# Altium PCB PCB_smart_home.PcbDoc
Units mil, origin at the board's own origin, x right, y up, seen from the top; angles counter-clockwise.
Board outline 3120 x 1595 mil, 2 copper layers (Top Layer, Bottom Layer); 22 components, 27 nets, 114 pads, 35 vias.
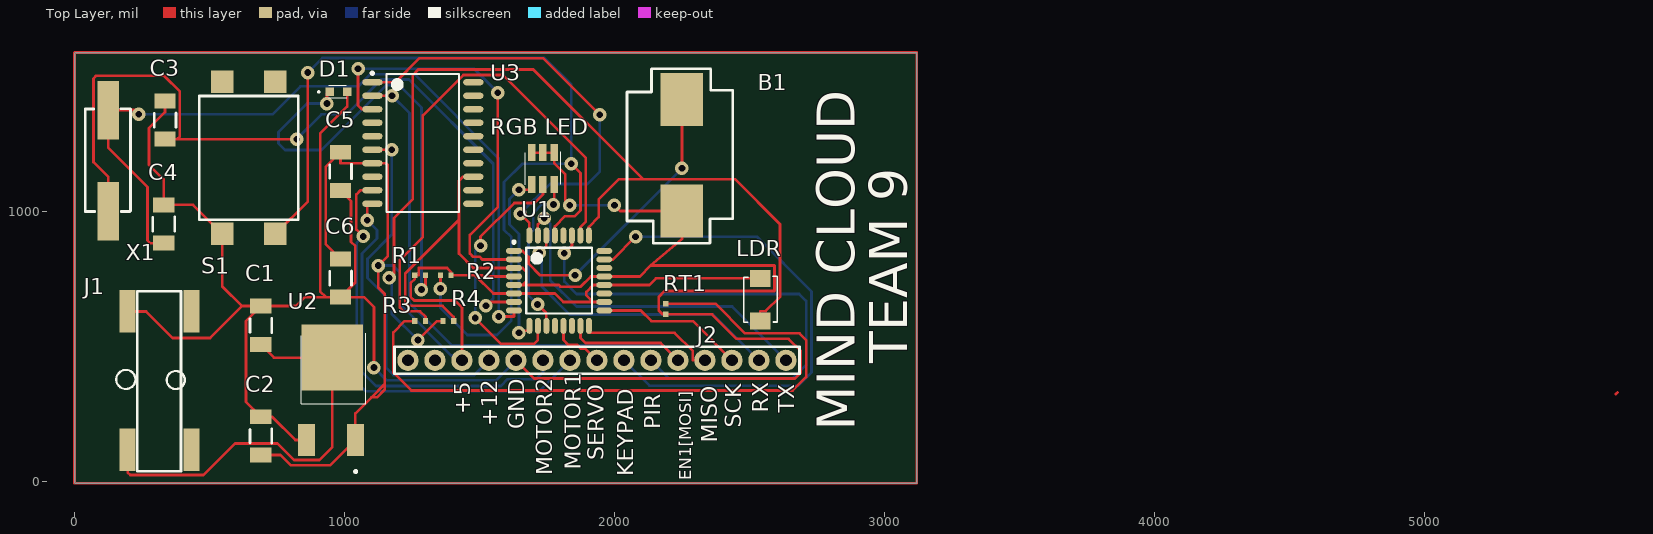
[diagram p0: Top Layer view]
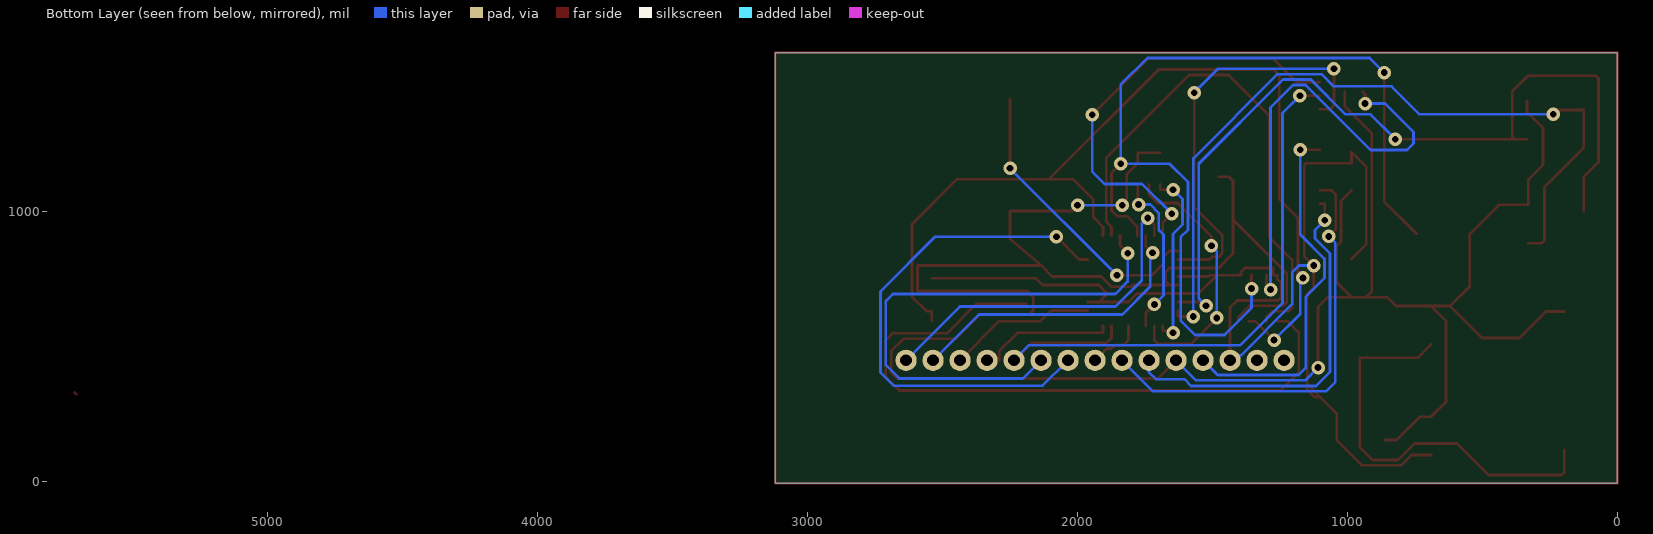
[diagram p1: Bottom Layer view, seen from below]

## Layer stack, top to bottom
Top Solder: solder mask 0.4, Solder Resist, Dk 3.5
Top Layer: signal copper 1.4
Dielectric 1: dielectric 12.6, FR-4, Dk 4.8
Bottom Layer: signal copper 1.4
Bottom Solder: solder mask 0.4, Solder Resist, Dk 3.5

## Board outline
0,-5 0,1590 3120,1590 3120,-5

## Design rules (kind name [scope] priority, off if disabled: settings)
Clearance [All] p1: gap=10 ignorepadtopadclearanceinfootprint=FALSE
PolygonConnect [All] p1: connectstyle=Relief reliefconductorwidth=10 reliefentries=4 polygonreliefangle="90 Angle" airgapwidth=10
RoutingVias [All] p1: holewidth=25 width=50 viastyle="Through Hole" minholewidth=25 minwidth=50 maxholewidth=25 maxwidth=50
SolderMaskExpansion [All] p1: expansion=4 istentingtop=FALSE
SupplyNets "Schematic Supply Nets_2" [InNet('+12')] p1: voltage=0.000
SupplyNets "Schematic Supply Nets_1" [InNet('GND')] p2: voltage=0.000
SupplyNets "Schematic Supply Nets" [InNet('+5')] p3: voltage=0.000
Width [All] p1: maxlimit=10 minlimit=10 preferedwidth=10
30 further rules are at their usual default settings.

## Components (designator, comment, footprint, x,y, rotation, side; value= is the part's Value field where it differs from the comment)
B1 "CMT-1271-88-SMT-TR" PCBComponent_1#1 2250,1210 r0 top
C1 "0.33uF" PCBComponent_1#2 690,580 r90 top
C2 "0.1uF" PCBComponent_1#2 690,170 r90 top
C3 "22PF" PCBComponent_1#2 335,1340 r90 top
C4 "22PF" PCBComponent_1#2 330,955 r90 top
C5 "100nF" PCBComponent_1#2 985,1150 r90 top
C6 "100nF" PCBComponent_1#2 985,755 r90 top
D1 "KPT-1608ZGC" PCBComponent_1#3 945,1445 r0 top
J1 "PJ-002AH-SMT-TR" PCBComponent_1#4 315,375 r90 top
J2 "connector;str header;single row;.1 cont centers;.095 tail;gold or gtx;36 contact" Header 2635,450 r180 top
LDR "RS1G" PCBComponent_1#5 2540,675 r0 top
R1 "330 Ω" RESC1005X04N 1280,765 r0 top
R2 "1K" RESC1005X04N 1375,765 r0 top
R3 "resistor SMD" RESC1005X04N 1280.31,595 r0 top
R4 "10k" RESC1005X04N 1384.68,595 r0 top
"RGB LED" "ASMB-TTF2-0B20B" PCBComponent_1#6 1735,1160 r90 top
RT1 "10K" RESC1005X04N 2190,640 r90 top
S1 "TS16-1212-85-BK-100-SMT-TR" PCBComponent_1#7 645,1200 r90 top
U1 "ATMEGA8A-AU_C16190" TQFP80P900X900X120-32N 1795,745 r0 top
U2 "MC78M05ACDTRKG" PCBComponent_1#8 955,460 r270 top
U3 "Driver L293D" SOIC127P1030X265-20N 1290,1255 r0 top
X1 "16 MHZ" PCBComponent_1#9 125,1190 r90 top

## Footprints (in the part's own frame and the unit in brackets; to place one, negate y for a bottom-side part, rotate by r counter-clockwise, add the part's x,y. Pads: shape width x height; smd on the part's side, far side on the other; paste and mask are expansions set on the pad)
Header [mm] "SIL Header"
  round 2 hole 1.1: 1(0,0) 2(2.54,0) 3(5.08,0) 4(7.62,0) 5(10.16,0) 6(12.7,0) 7(15.24,0) 8(17.78,0) 9(20.32,0) 10(22.86,0) 11(25.4,0) 12(27.94,0) 13(30.48,0) 14(33.02,0) 15(35.56,0)
  silkscreen extent -1.27,-1.27 36.83,1.27, body extent -1.33,-1.35 36.93,1.35, height 8.6
PCBComponent_1#1 [mm]
  rect 4x5 smd: 1(0,5.25) 2(0,-5.25)
  silkscreen extent -5.18,-8.28 4.78,8.13, body extent -6.55,-6.82 6.25,7.08, height 7.15
PCBComponent_1#2 [mm]
  rect 1.4x2 smd: 1(-1.8,0) 2(1.8,0)
  silkscreen extent -0.69,-1.04 0.66,1.02, body extent -1.65,-1 1.55,0.8, height 1.6
PCBComponent_1#3 [mm]
  rect 0.8x0.8 smd: 1(0,0) 2(1.65,0)
  silkscreen extent -1.08,-0.56 1.6,0.61, body extent -0.01,-0.37 1.59,0.43, height 1.11
PCBComponent_1#4 [mm]
  rect 4x1.5 smd: 1(-6.5,3) 2(6.5,3) 3(6.5,-3) 4(-6.5,-3)
  silkscreen extent -8.53,-2.37 8.41,4.07, body extent -6.05,-6.93 6.55,7.97, height 11.01
PCBComponent_1#5 [mm]
  rect 1.9x1.6 smd: 1(0,2) 2(0,-2)
  silkscreen extent -1.55,-2.13 1.6,2.18, body extent -1.38,-2.54 1.18,2.6, height 2.58
PCBComponent_1#6 [mm]
  rect 1.6x0.7 smd: 1(-1.5,1.05) 2(1.5,1.05) 3(-1.5,0) 4(1.5,0) 5(-1.5,-1.05) 6(1.5,-1.05)
  silkscreen extent -1.52,-1.65 1.57,1.68, body extent -1.85,-1.72 1.85,1.78, height 2.8
PCBComponent_1#7 [mm]
  rect 2.1x2.1 smd: 1(-7.15,2.5) 2(-7.15,-2.5) 3(7.15,2.5) 4(7.15,-2.5)
  silkscreen extent -5.82,-4.67 5.82,4.65, body extent -7.6,-6.23 7.6,5.77, height 8.8
PCBComponent_1#8 [mm]
  rect 6.2x5.8 smd: 1(0,0)
  rect 3x1.6 smd: 2(7.747,2.159) 3(7.747,-2.411)
  silkscreen extent -2.29,-2.95 10.82,3.15, body extent -1.85,-3.3 8.05,3.2, height 2.59
PCBComponent_1#9 [mm]
  rect 5.5x2 smd: 1(-4.75,0) 2(4.75,0)
  silkscreen extent -4.8,-2.08 4.88,2.16, body extent -6.55,-2.33 6.65,2.47, height 4.31
RESC1005X04N [mm] "Chip Resistor, 2-Leads, Body 1.00x0.50mm, IPC Medium Density"
  rect 0.5x0.55 smd: 1(-0.5,0) 2(0.5,0)
  body extent -0.53,-0.28 0.53,0.28, height 0.4
SOIC127P1030X265-20N [mm] "SOIC, 20-Leads, Body 12.80x7.50mm, Pitch 1.27mm, IPC Medium Density"
  oval 1.9x0.6 smd: 1(-4.75,5.715) 2(-4.75,4.445) 3(-4.75,3.175) 4(-4.75,1.905) 5(-4.75,0.635) 6(-4.75,-0.635) 7(-4.75,-1.905) 8(-4.75,-3.175) 9(-4.75,-4.445) 10(-4.75,-5.715) 11(4.75,-5.715) 12(4.75,-4.445) 13(4.75,-3.175) 14(4.75,-1.905) 15(4.75,-0.635) 16(4.75,0.635) 17(4.75,1.905) 18(4.75,3.175) 19(4.75,4.445) 20(4.75,5.715)
  silkscreen extent -4.87,-6.5 3.4,6.69, body extent -5.16,-6.5 5.16,6.5, height 2.65
TQFP80P900X900X120-32N [mm] "TQFP, 32-Leads, Body 7.00x7.00mm, Pitch 0.80mm, IPC Medium Density"
  oval 1.5x0.55 smd: 1(-4.25,2.8) 2(-4.25,2) 3(-4.25,1.2) 4(-4.25,0.4) 5(-4.25,-0.4) 6(-4.25,-1.2) 7(-4.25,-2) 8(-4.25,-2.8) 17(4.25,-2.8) 18(4.25,-2) 19(4.25,-1.2) 20(4.25,-0.4) 21(4.25,0.4) 22(4.25,1.2) 23(4.25,2) 24(4.25,2.8)
  oval 0.55x1.5 smd: 9(-2.8,-4.25) 10(-2,-4.25) 11(-1.2,-4.25) 12(-0.4,-4.25) 13(0.4,-4.25) 14(1.2,-4.25) 15(2,-4.25) 16(2.8,-4.25) 25(2.8,4.25) 26(2,4.25) 27(1.2,4.25) 28(0.4,4.25) 29(-0.4,4.25) 30(-1.2,4.25) 31(-2,4.25) 32(-2.8,4.25)
  silkscreen extent -4.37,-3.1 3.1,3.75, body extent -4.5,-4.5 4.5,4.5, height 1.2

## Part data
B1: library part buzzer, "88dB Passive (external drive) Electromagnetic Type 2.4kHz Buzzers ROHS", manufactor=CUI, supplier part number=C3811771, ComponentLink1Description="snapeda link", ComponentLink1URL=https://www.snapeda.com/parts/CMT-1271-88-SMT-TR/CUI%20Devices/view-part/?ref=search&t=Buzzer%20smd, ComponentLink2Description=datasheet, ComponentLink2URL=https://www.snapeda.com/parts/CMT-1271-88-SMT-TR/CUI%20Devices/datasheet/, manufactor part number=CMT-1271-88-SMT-TR, supplier=LCSC
C1 C2 C3 C4 C5 C6: library part "capacitor_1206 CODE", "100V 100nF C0G ±5% 1206 Multilayer Ceramic Capacitors MLCC - SMD/SMT ROHS", manufactor="Murata Electronics", manufactor part number=GRM31C5C2A104JA01L, supplier part number=C405303, ComponentLink1Description="snapeda link", ComponentLink1URL=https://www.snapeda.com/parts/GRM31C5C2A104JA01L/Murata/view-part/?ref=search&t=1206%20cap%20smd, ComponentLink2Description=Datasheet, ComponentLink2URL=https://www.snapeda.com/parts/GRM31C5C2A104JA01L/Murata/datasheet/, supplier=LCSC
D1: library part LED, "SMD LED Indication - Discrete ROHS", Manufacturer=Kingbright, supplier part number=C598364, ComponentLink1Description=datasheet, ComponentLink1URL=https://www.snapeda.com/parts/KPT-1608ZGC/Kingbright/datasheet/, ComponentLink2Description="snapeda link", ComponentLink2URL=https://www.snapeda.com/parts/KPT-1608ZGC/Kingbright/view-part/?welcome=home&ref=search&t=LED+SMD, ComponentLink3Description="LCSC link", ComponentLink3URL=https://www.lcsc.com/product-detail/LED-Indication-Discrete_Kingbright-KPT-1608ZGC_C598364.html, Manufacturer part number=KPT-1608ZGC, supplier=LCSC
J1: library part "DC connector", "SMD DC Power Connectors ROHS", Manufacturer=CUI, package=SMD, supplier part number=C22434687, ComponentLink1Description="snapeda link", ComponentLink1URL=https://www.snapeda.com/parts/PJ-002AH-SMT-TR/CUI%20Devices/view-part/?ref=search&t=DC%20connector%20SMD, ComponentLink2Description=datasheet, ComponentLink2URL=https://www.snapeda.com/parts/PJ-002AH-SMT-TR/CUI%20Devices/datasheet/, Manufacturer part number=PJ-002AH-SMT-TR, supplier=LCSC
J2: library part "Single row; PCB headers", Current Rating="3Amps Continuous", Manufacturer=FCI, Manufacturer Part No.=68000-236HLF, Created By="R Kanjee", Date Created="1 March 2015", RS Stock No.=2509565626
LDR: library part "LDR sensor", "1A Independent Type 1.3V@1A 400V SMA(DO-214AC) Diodes - General Purpose ROHS", manufactor="SMC(Sangdest Microelectronicstronic (Nanjing))", ComponentLink1Description=snapeda, ComponentLink1URL=https://www.snapeda.com/parts/RS1G/Taiwan%20Semiconductor/view-part/?ref=search&t=LDR%20sensor%20smd, ComponentLink2Description=datasheet, ComponentLink2URL=https://www.snapeda.com/parts/RS1G/Taiwan%20Semiconductor/datasheet/, manufactor part time=RS1G, supplier=LCSC, supplier part time=C260336
R1 R2 R3 R4: library part Resistor, "500mW Thick Film Resistors 400V ±100ppm/℃ ±1% 100Ω 1210 Chip Resistor - Surface Mount ROHS", Manufacturer=PANASONIC, Manufacturer part number=ERJ-U14F1000U, supplier part number=C1014086, ComponentLink1Description=Datasheet, ComponentLink1URL=https://www.lcsc.com/datasheet/lcsc_datasheet_2201131530_PANASONIC-ERJ-U14F1000U_C1014086.pdf, supplier=Lcsc
"RGB LED": library part "RGB LED", "PLCC-6 RGB LEDs ROHS", manufactor="Broadcom Limited", supplier part number=C6126294, ComponentLink1Description="snapeda link", ComponentLink1URL=https://www.snapeda.com/parts/ASMB-TTF2-0B20B/Broadcom%20%2F%20Avago/view-part/?ref=search&t=RGB%20led%20smd, ComponentLink2Description=datasheet, ComponentLink2URL=https://www.snapeda.com/parts/ASMB-TTF2-0B20B/Avago%20Technologies/datasheet/, ComponentLink3Description="LCSC link", ComponentLink3URL=https://www.lcsc.com/product-detail/RGB-LEDs_Broadcom-Limited-ASMB-TTF2-0B20B_C6126294.html, manufactor part number=ASMB-TTF2-0B20B, supplier=LCSC
RT1: library part "NTC temperature sensor", "10kΩ ±0.5% 3380K ±0.7% 0402 NTC Thermistors ROHS / Recommended For You", Manufacturer="Murata Electronics", Manufacturer part number=NCU15XH103D6SRC, supplier part number=C17294780, ComponentLink1Description=datasheet, ComponentLink1URL=https://www.lcsc.com/datasheet/lcsc_datasheet_2401291008_Murata-Electronics-NCU15XH103D6SRC_C17294780.pdf, supplier=lcsc
S1: library part switch, "50mA Standing paste SPST - normally open 100gf 12V Tactile Switches ROHS", manufactor=CUI, supplier part number=C6338790, ComponentLink1Description=snapeda, ComponentLink1URL=https://www.snapeda.com/parts/TS16-1212-85-BK-100-SMT-TR/CUI%20Devices/view-part/?ref=search&t=switch%20smd, ComponentLink2Description=datasheet, ComponentLink2URL=https://www.snapeda.com/parts/TS16-1212-85-BK-100-SMT-TR/CUI%20Devices/datasheet/, manufactor part time=TS16-1212-85-BK-100-SMT-TR, supplier=LCSC
U1: library part ATMEGA8A-AU, "8KB 1KB FLASH 23 2.7V~5.5V AVR 16MHz TQFP-32(7x7) Microcontrollers (MCU/MPU/SOC) ROHS", Manufacturer="Microchip Tech", supplier part number=C16190, ComponentLink1Description=Datasheet, ComponentLink1URL=https://www.lcsc.com/datasheet/lcsc_datasheet_1810161120_Microchip-Tech-ATMEGA8A-AU_C16190.pdf, Manufacturer part number=ATMEGA8A-AU, supplier=LCSC
U2: library part regulator, "500mA 80dB@(120Hz) Fixed 5V Positive electrode 35V TO-252-2(DPAK) Voltage Regulators - Linear, Low Drop Out (LDO) Regulators ROHS", Manufacturer=onsemi, supplier part number=C232660, ComponentLink1Description="snapeda link", ComponentLink1URL=https://www.snapeda.com/parts/MC78M05ACDTRKG/onsemi/view-part/?ref=search&t=regulator%205v%20smd, ComponentLink2Description=Datasheet, ComponentLink2URL=https://www.snapeda.com/parts/MC78M05ACDTRKG/onsemi/datasheet/, ComponentLink3Description="LCSC link", ComponentLink3URL=https://www.lcsc.com/product-detail/Voltage-Regulators-Linear-Low-Drop-Out-LDO-Regulators_onsemi-MC78M05ACDTRKG_C232660.html, Manufacturer part number=MC78M05ACDTRKG, supplier=LCSC
U3: "SOIC-20-300mil Stepper Motor Driver ROHS", Manufacturer=STMicroelectronics, Manufacturer part number=L293DD013TR, supplier part number=C21610, ComponentLink1Description=datasheet, ComponentLink1URL=https://www.lcsc.com/datasheet/lcsc_datasheet_2304140030_STMicroelectronics-L293DD013TR_C21610.pdf, supplier=LCSC
X1: library part crystal, "16MHz ±30ppm ±50ppm HC-49S-SMD Crystals ROHS", ComponentLink1Description="snapeda link", ComponentLink1URL=https://www.snapeda.com/parts/ECS-160-S-5P-TR/ECS%20International/view-part/?ref=search&t=16MHZ%20crystl, ComponentLink2Description=datasheet, ComponentLink2URL=https://www.lcsc.com/datasheet/lcsc_datasheet_2211020230_ECS-ECS-160-S-5P-TR_C2450888.pdf, ComponentLink3Description="LCSC link", ComponentLink3URL=https://www.lcsc.com/product-detail/Crystals_span-style-background-color-ff0-ECS-span-ECS-160-S-5P-TR_C2450888.html

## Via types
v1: diameter 50, hole 25, Top Layer to Bottom Layer, 35 vias

## Nets (pads, with @x,y where several pads share a name; then routed paths per layer and width w, separated by ;. In a path a pad name is that pad's centre, name@x,y a point inside that pad or via, vN(x,y) a via of type N, cw(c..) or ccw(c..) an arc to the next point about the centre after c; other vN are vias at no path point)
+5: C2.1 C5.2 C6.2 J2.13 LDR.1 R1.1 R2.2 U1.4 U1.6 U1.18 U1.20 U2.2 U3.7 | length 4903
  Top Layer w10: C2.1 762.87,99.13 801.06,60.94 945.94,60.94 U2.2 1040,253 1100,313 ; C6.2 930,880.87 930,1165.87 C5.2 985,1180 U3.7 1154,1180 1160.63,1173.37 1160.63,836.63 v1(1125,801) 1125,719.83 1149,695.83 1149,362 ; J2.13 1435,645 1408.37,671.63 1258.37,671.63 1245,685 1245,736.31 1260.32,751.63 R1.1 1274.46,765 1274.46,792 1380,792 1394.69,777.31 R2.2 1484,765 ; U1.4 1513.25,760.75 1509,765 1484,765 ; U1.18 1920,666.26 ; LDR.1 2154,753.74 2129.51,729.25 U1.20 1921.25,729.25 1895.74,703.74 1895.74,690.52 1920,666.26 ; 1100,313 1149,362 ; 1100,313 1120,313 1149,342 1149,362 ; 1484,765 1551.24,697.76 U1.6 1779,697.76 1810.5,666.26 1920,666.26
  Bottom Layer w10: v1(1125,801) 1180,801 1205,776 1205,658 1395,468 1435,468 J2.13
+12: J2.12 U3.6 | length 1359.9
  Top Layer w10: U3.6 v1(1175,1230)
  Bottom Layer w10: v1(1175,1230) 1175,916 1085,826 1085,755 1155,685 1155,421.63 1181,395.63 1480.63,395.63 J2.12
BLUE: "RGB LED.5" U1.11 | length 615.4
  Top Layer w10: v1(1715,657) 1747.76,624.24 U1.11 ; v1(1774,1027) 1776.34,1029.34 1776.34,1100.94
  Bottom Layer w10: v1(1715,657) 1681.78,690.22 1681.78,916.15 1699.25,933.62 1699.25,996.1 1730.15,1027 v1(1774,1027)
BUZZER: B1.1 U1.1 | length 1094.5
  Top Layer w10: U1.1 1660,855.24 1681.78,833.45 1681.78,807.79 1724.58,765 v1(1854,765) ; v1(2250,1161) B1.1
  Bottom Layer w10: v1(1854,765) v1(2250,1161)
EN1: J2.5 U1.15 U3.2 | length 2390.1
  Top Layer w10: U3.2 v1(1176,1430) ; U1.15 1873.74,533 1892.74,514 2171,514 J2.5
  Bottom Layer w10: v1(1176,1430) 1240.63,1365.37 1240.63,662.37 1397,506 2179,506 J2.5
GND: "RGB LED.2" "RGB LED.4" "RGB LED.6" B1.2 C1.2 C2.2 C3.2 C4.2 C5.1 C6.1 D1.2 J1.2 J2.11 R4.2 RT1.1 S1.1 U1.3 U1.5 U1.21 U2.3 U3.13 | length 10326.1
  Top Layer w10: J1.2 265.09,630.91 363,533 502.13,533 620,650.87 ; C3.2 335,1369 276,1310 276,1174 330,1120 C4.2 439.21,1025.87 S1.1 546.58,724.29 620,650.87 ; U2.3 817.87,155 732,240.87 C2.2 635,295.87 635,595.87 C1.2 ; C5.1 1024,1040.13 1024,889 1040,873 1040,739.13 C6.1 ; D1.2 1009.96,1389.89 910,1289.93 910,705 930.87,684.13 ; v1(1109,423) 1109,647 1071.87,684.13 C6.1 ; R4.2 1404.37,610.63 1363.37,651.63 1238.37,651.63 1225,665 1225,771.63 1424,970.63 ; U3.13 1439,1130 1424,1115 1424,970.63 ; U1.5 1660,729.25 ; J2.11 1702,383 2668,383 2690,405 2690,485 2645.24,529.76 2452.26,529.76 2361.7,620.32 RT1.1 2178.68,620.32 2164,635 2164,685 2186,707 2593,707 2593,801 2134,801 ; 1693.66,1219.06 1735,1219.06 1776.34,1219.06 1776.34,1180.66 1818,1139 1818,1040 v1(1834,1024) ; v1(2000,1024) 2021,1003 B1.2@2250,1003 ; B1.2 B1.2@2250,1003 ; 620,650.87 C1.2 ; C1.2 820,650.87 853.27,684.13 930.87,684.13 ; 930.87,684.13 C6.1 ; 1424,970.63 1424,845 1476.76,792.24 U1.3 1660,792.24 1673,779.24 1673,742.25 1660,729.25 ; 1660,729.25 1794,729.25 1800.75,722.5 1874,722.5 1912.24,760.75 U1.21 2093.75,760.75 2134,801 ; 2134,801 2250,899.48 B1.2@2250,1003
  Bottom Layer w10: v1(1109,423) 1156.37,375.63 1560.63,375.63 J2.11 ; v1(1834,1024) v1(2000,1024)
GREEN: "RGB LED.3" U1.10 | length 971.8
  Top Layer w10: v1(1484,607) 1580,511 1702.26,511 1716.26,525 U1.10 ; v1(1504,874) 1504,908 1629,1033 1703,1033 1735,1065 1735,1100.94
  Bottom Layer w10: v1(1484,607) 1484,854 v1(1504,874)
IN1: U1.32 U3.1 | length 1630.5
  Top Layer w10: U3.1 1189,1480 1278.17,1569.17 1735.83,1569.17 v1(1945,1360) ; v1(1651,993) 1684.76,959.24 U1.32
  Bottom Layer w10: v1(1651,993) 1761,1103 1900,1103 1945,1148 v1(1945,1360)
IN2: U1.2 U3.3 | length 1561.2
  Top Layer w10: v1(1050,1530) 1050,1394 1064,1380 U3.3 ; v1(1568,1441) 1568,1018 1464,914 1464,845 1475,834 1500,834 1510.26,823.74 U1.2
  Bottom Layer w10: v1(1050,1530) 1479,1530 v1(1568,1441)
KEYPAD: J2.7 U1.23 | length 1940.9
  Top Layer w10: U1.23 1993.74,823.74 v1(2078,908)
  Bottom Layer w10: J2.7 2129,356 2681,356 2730,405 2730,705 2527,908 v1(2078,908)
LDR: LDR.2 R4.1 U1.25 | length 3532.9
  Top Layer w10: v1(1165,755) 1183,773 1183,977 1253,1047 1253,1507 1273,1527 1699,1527 2105,1121 ; v1(1272,525) 1342,595 R4.1 ; U1.25 1905.24,944.23 1941.24,980.23 1941.24,1045 2017.24,1121 2105,1121 ; LDR.2 2540,632 2560,632 2613,685 2613,954 2446,1121 2105,1121
  Bottom Layer w10: v1(1165,755) 1175,745 1175,622 v1(1272,525)
MISO: J2.4 U1.16 | length 518.2
  Top Layer w10: U1.16 1905.24,552 2223,552 2290,485 2290,450 J2.4
MOTOR1: J2.9 U3.9 | length 1633.2
  Top Layer w10: v1(1069,909) 1044,934 1044,1065 1059,1080 U3.9
  Bottom Layer w10: v1(1069,909) 1045,885 1045,369 1079,335 1720,335 J2.9
MOTOR2: J2.10 U3.10 | length 1436.9
  Top Layer w10: v1(1084,969) 1084,1030 U3.10
  Bottom Layer w10: v1(1084,969) 1120,933 1120,901 1065,846 1065,407 1117,355 1579,355 1604,380 1710,380 1735,405 J2.10
NetC1_1: C1.1 J1.1 U2.1 | length 1556.4
  Top Layer w10: J1.1 196.89,35 206.89,25 478,25 595,142 751.94,142 813,80.94 907,80.94 955,128.94 U2.1 739.13,460 C1.1
NetD1_1: D1.1 R1.2 | length 1720.3
  Top Layer w10: v1(935,1401) 935,1435 D1.1 ; v1(1285,712) 1299.69,726.69 R1.2
  Bottom Layer w10: v1(935,1401) 861,1401 755.7,1295.7 755.7,1253.44 780,1229.13 914.13,1229.13 1155,1470 1201,1470 1285,1386 v1(1285,712)
NetR3_1: R3.1 RT1.2 | length 2536.4
  Top Layer w10: R3.1 1221.78,595 1180.63,553.85 1180.63,405 1247.63,338 2660,338 2710,388 2710,524.76 2685,549.76 2484,549.76 2374.08,659.69 RT1.2
NTC: R3.2 U1.26 | length 1962
  Top Layer w10: R3.2 1300,611.63 1280,631.63 1218.37,631.63 1205,645 1205,822 1290,907 1290,1357 1440,1507 1587,1507 1894,1200 1894,964 1873.74,943.74 U1.26
PIR: J2.6 U1.27 | length 1968.3
  Top Layer w10: v1(1814,847) 1842.24,875.24 U1.27
  Bottom Layer w10: v1(1814,847) 1814,742 1860,696 2684,696 2710,670 2710,433 2660,383 2202,383 J2.6
RED: "RGB LED.1" U1.9 | length 685.9
  Top Layer w10: v1(1646,552) 1653,559 1684.76,559 U1.9 ; v1(1646,1082) 1693.66,1082 1693.66,1100.94
  Bottom Layer w10: v1(1646,552) 1646,918 1611,953 1611,1047 v1(1646,1082)
RESET: R2.1 S1.2 U1.29 | length 3568.5
  Top Layer w10: S1.2 864,1039.08 v1(864,1516) ; v1(1355.32,715.68) R2.1 ; U1.29 1779.25,946.25 1817,984 1853,984 1874,1005 1874,1144 v1(1840,1178)
  Bottom Layer w10: v1(864,1516) 918,1570 1741,1570 1840,1471 v1(1840,1178) 1659,1178 1591,1110 1591,933 1618,906 1618,597 1565,544 1455,544 1355.32,643.68 v1(1355.32,715.68)
RX: J2.2 U1.30 | length 1121
  Top Layer w10: v1(1722,848) 1747.76,873.76 U1.30
  Bottom Layer w10: v1(1722,848) 1730.64,839.36 1730.64,723 1833.64,620 2365,620 J2.2
SCK: J2.3 U1.17 | length 549.2
  Top Layer w10: U1.17 2097.24,634.76 2137,595 2290,595 J2.3
SERVO: J2.8 U1.13 | length 208
  Top Layer w10: U1.13 1810.75,525 1828.75,507 1862,507 1875,494 1891,494 J2.8
TX: J2.1 U1.31 | length 1310.3
  Top Layer w10: U1.31 1716.26,953.26 v1(1740,977)
  Bottom Layer w10: v1(1740,977) 1762,955 1762,745.96 1858.96,649 2436,649 J2.1
XTAL1: C3.1 U1.7 X1.1 | length 3126.5
  Top Layer w10: X1.1 125,1129 70,1184 70,1494 80,1504 332,1504 390,1446 390,1279.13 380,1269.13 ; C3.1 380,1269.13 ; v1(823.13,1269.13) 380,1269.13 ; v1(1524,652) 1538.26,666.26 U1.7
  Bottom Layer w10: v1(823.13,1269.13) 915,1361 1007,1361 1136,1490 1239.11,1490 1551,1178.11 1551,679 v1(1524,652)
XTAL2: C4.1 U1.8 X1.2 | length 2916.8
  Top Layer w10: v1(238,1361) 221.99,1377.01 X1.2 125,1237 269.87,1092.13 269.87,894.27 280,884.13 C4.1 ; v1(1571,612) 1628,612 1628,634.76 U1.8
  Bottom Layer w10: v1(238,1361) 733.34,1361 837.22,1464.88 1050.88,1464.88 1096,1510 1259.11,1510 1571,1198.11 v1(1571,612)
pads on no net: J1.3 J1.4 J2.14 J2.15 S1.3 S1.4 U1.12 U1.14 U1.19 U1.22 U1.24 U1.28 U3.4 U3.5 U3.8 U3.11 U3.12 U3.14 U3.15 U3.16 U3.17 U3.18 U3.19 U3.20
copper on no net: | length 9438.3
  Top Layer w10: 5709.14,325 5715,330.86 ; 0,-5 3120,-5 3120,1590 0,1590 0,-5

## Other copper
Top Layer:

## Silkscreen, mask and mechanical layers (free items; w line width, h text height)
Top Overlay:
  text "TEAM 9" at 3085,440 h140 r90
  text "RX" at 2570,255 h60 r90
  text "TX" at 2665,255 h60 r90
  text "+5" at 1465,250 h60 r90
  text "+12" at 1565,205 h60 r90
  text "SCK" at 2470,200 h60 r90
  text "GND" at 1665,195 h60 r90
  text "PIR" at 2170,195 h60 r90
  text "MIND CLOUD" at 2890,190 h140 r90
  text "MISO" at 2380,145 h60 r90
  text "SERVO" at 1960,80 h60 r90
  text "MOTOR1" at 1875,45 h60 r90
  text "MOTOR2" at 1770,25 h60 r90
  text "KEYPAD" at 2070,20 h60 r90
  text "EN1[MOSI]" at 2285,5 h45 r90